# Altium PCB pcb-arduino-uno-r3-v1.PcbDoc
Units mil, origin at the board's own origin, x right, y up, seen from the top; angles counter-clockwise.
Board outline 2728.4 x 2278.4 mil, 2 copper layers (Top Layer, Bottom Layer); 50 components, 52 nets, 202 pads, 52 vias.
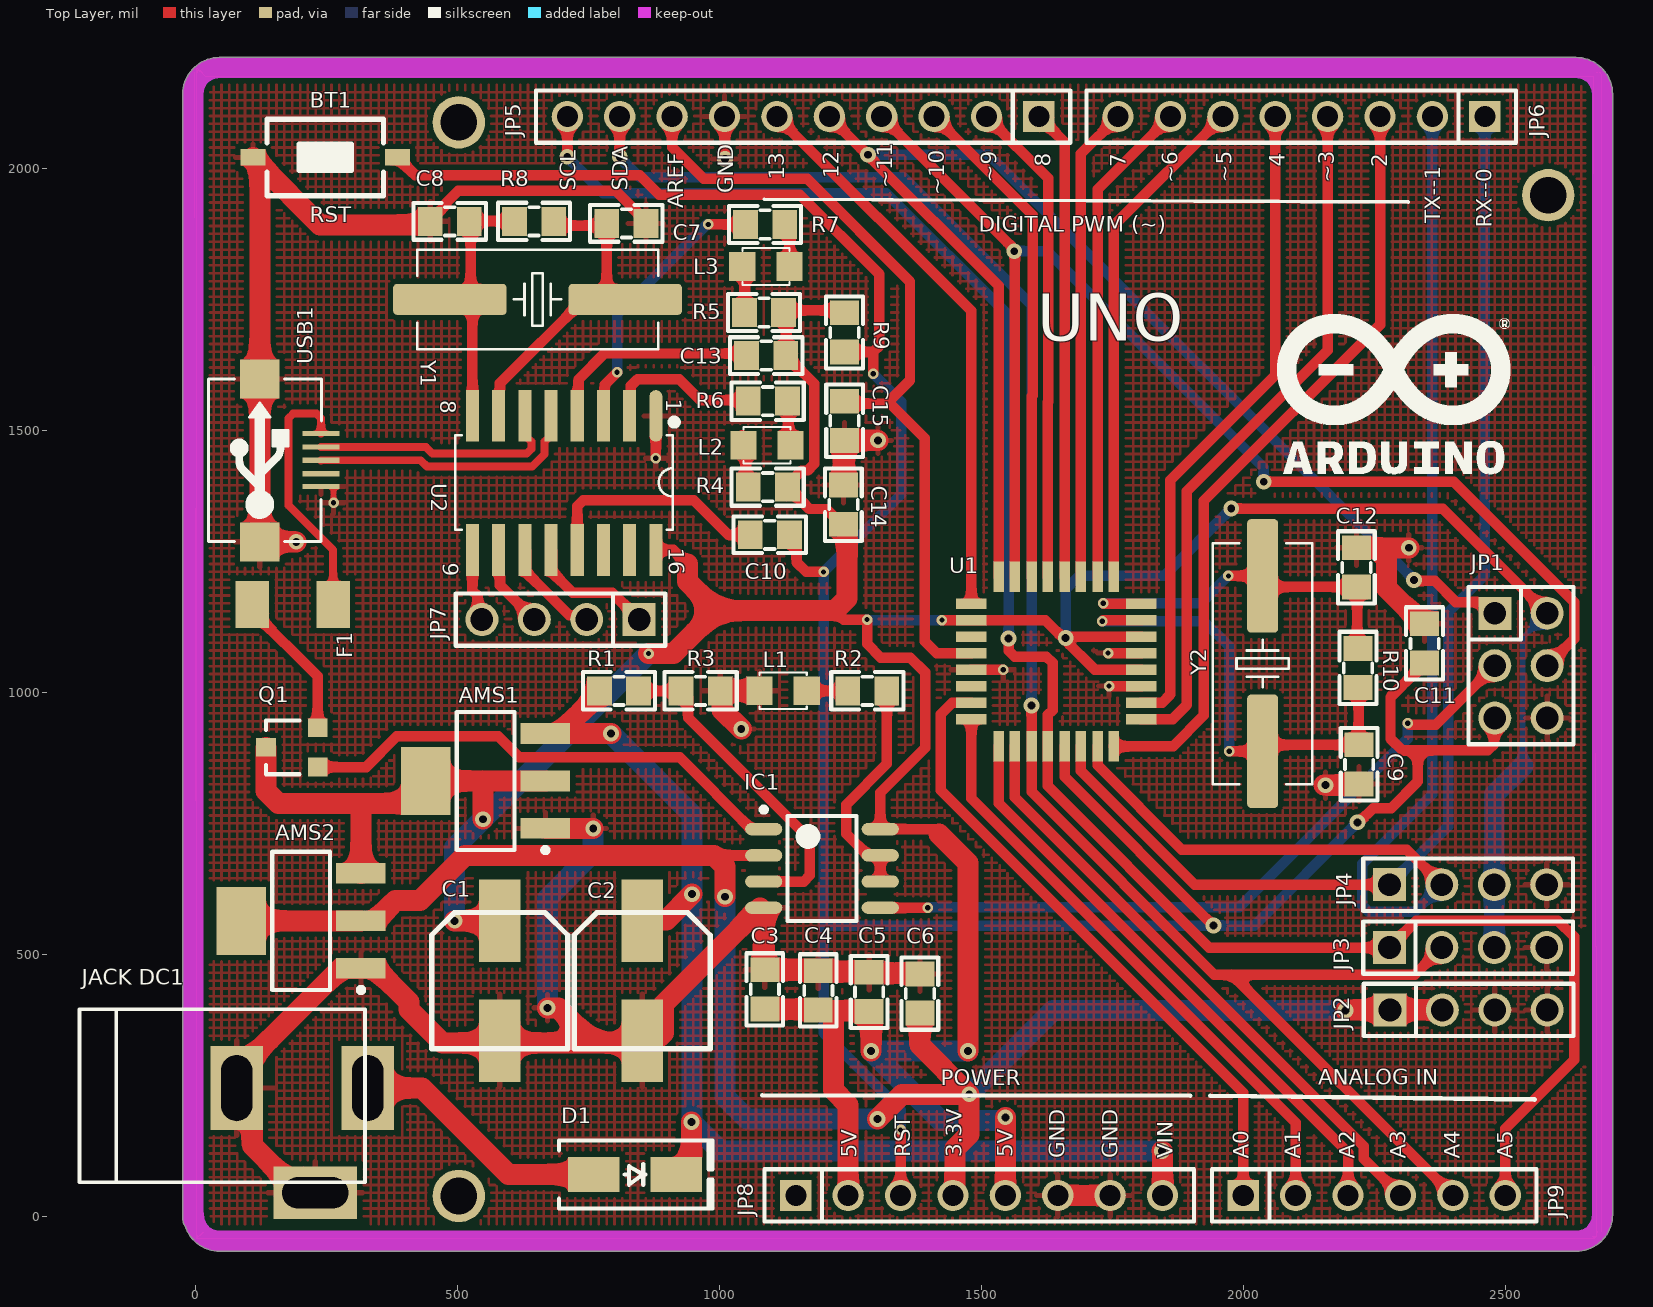
[diagram p0: Top Layer view]
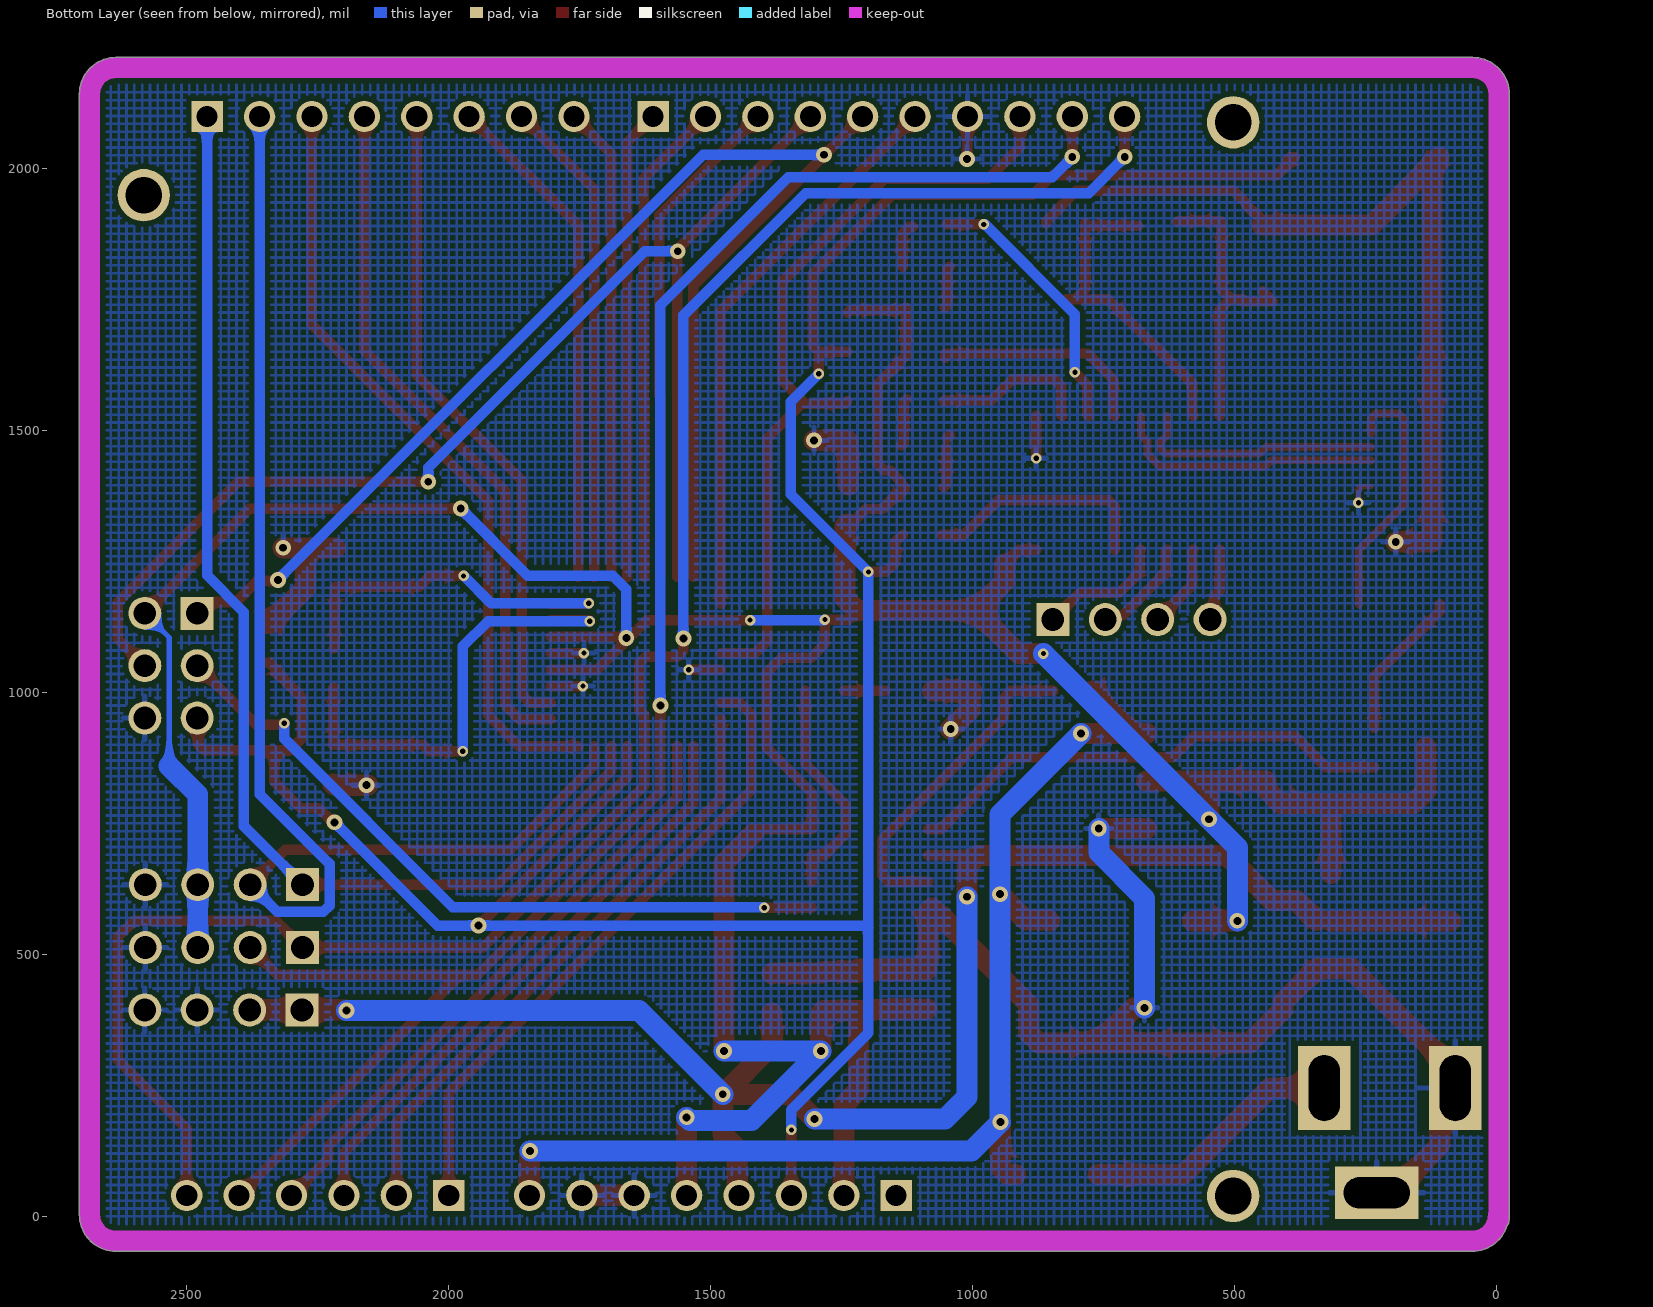
[diagram p1: Bottom Layer view, seen from below]
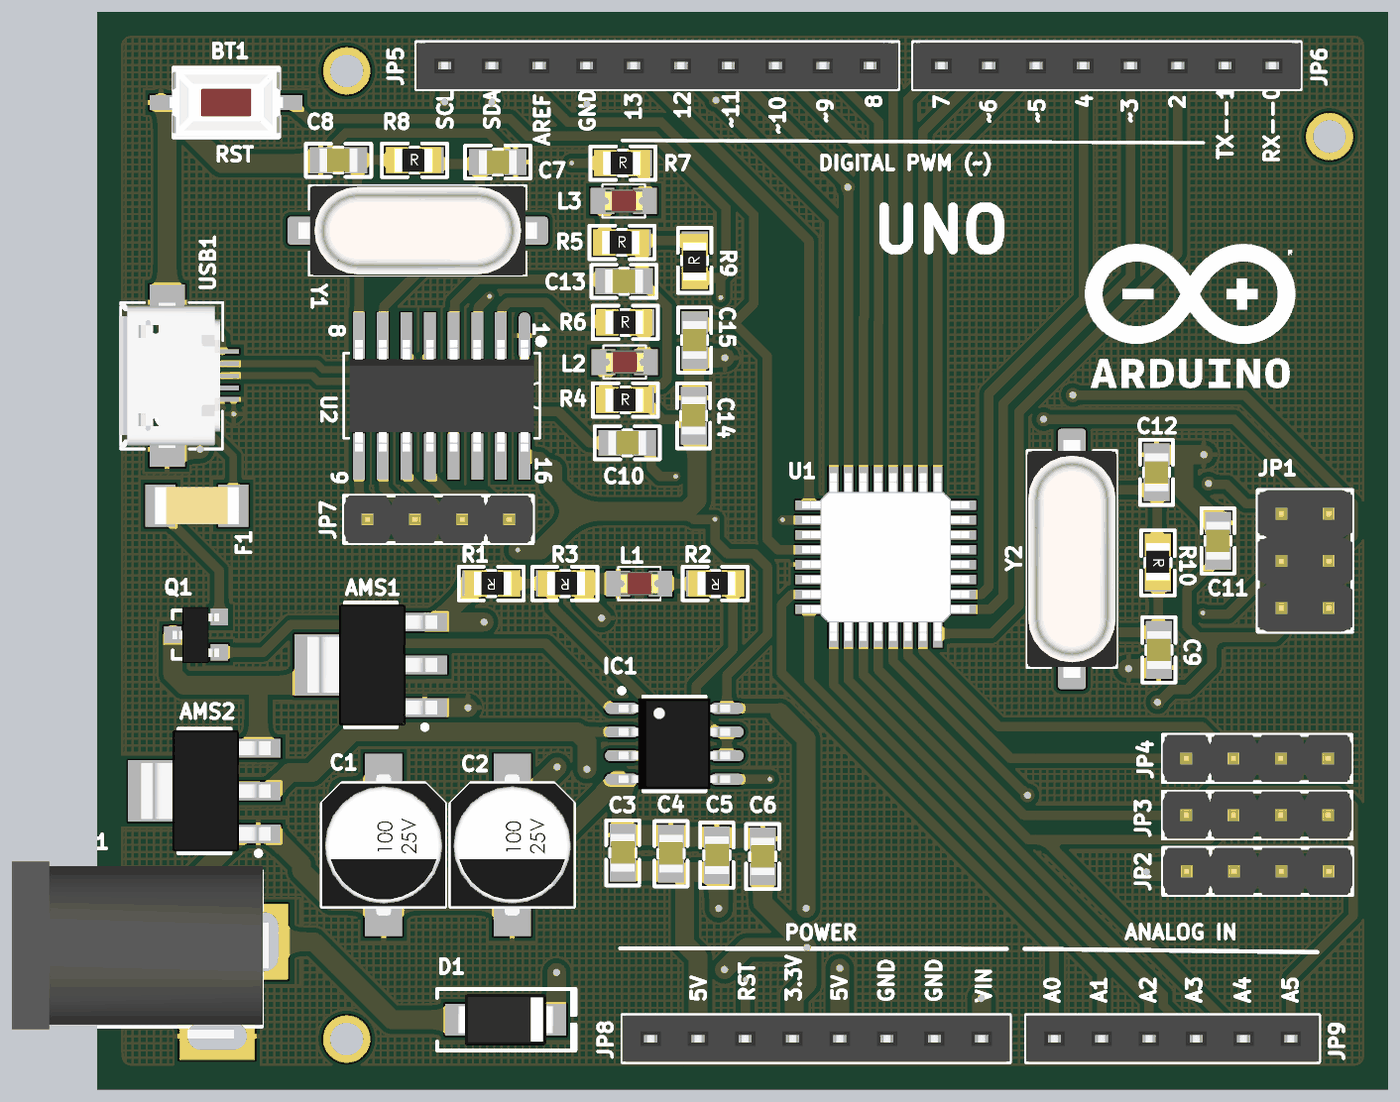
[diagram p2: 3D render of the assembled board from above, using the file's embedded part models]

## Layer stack, top to bottom
Top Solder: solder mask 0.4, Solder Resist, Dk 3.5
Top Layer: signal copper 1.4
Dielectric 1: dielectric 12.6, FR-4, Dk 4.8
Bottom Layer: signal copper 1.4
Bottom Solder: solder mask 0.4, Solder Resist, Dk 3.5

## Board outline
-20.35,-17.35 cw(c-5,-5) -24.7,-5 -24.7,2143 cw(c45,2143) 45,2212.7 2634,2212.7 cw(c2634,2143) 2703.7,2143 2703.7,4 cw(c2634,4) 2634,-65.7 46,-65.7 cw(c46,4)

## Design rules (kind name [scope] priority, off if disabled: settings)
Clearance [All] p1: gap=10 ignorepadtopadclearanceinfootprint=FALSE
DiffPairsRouting [All] p1: maxlimit=10 minlimit=10 mostfreqgap=10 toplayer_minwidth=15 toplayer_maxwidth=15 toplayer_prefwidth=15 bottomlayer_minwidth=15 bottomlayer_maxwidth=15 bottomlayer_prefwidth=15 maxuncoupledlength=500
HoleSize [All] p1: absolutevalues=TRUE maxlimit=300 minlimit=1 maxpercent=80.000 minpercent=20.000
MinimumSolderMaskSliver [All] p1: minsoldermaskwidth=3
PolygonConnect [All] p1: connectstyle=Relief reliefconductorwidth=10 reliefentries=4 polygonreliefangle="90 Angle" airgapwidth=10
RoutingVias [All] p1: holewidth=15 width=30 viastyle="Through Hole" minholewidth=10 minwidth=20 maxholewidth=28 maxwidth=50
SolderMaskExpansion SolderMaskExpansion_1 [isVia] p1: expansion=4 istentingtop=TRUE
SolderMaskExpansion [All] p2: expansion=4 istentingtop=FALSE
Width [All] p1: maxlimit=40 minlimit=10 preferedwidth=20
27 further rules are at their usual default settings.

## Classes and differential pairs
differential pair USB: +USB_P -USB_N

## Components (designator, comment, footprint, x,y, rotation, side; value= is the part's Value field where it differs from the comment)
AMS1 "AMS1117-5V" SOT223 553,832 r90 top value="AMS1117-3.3V SOT223"
AMS2 "AMS1117-3.3V" SOT223 201,565 r90 top value="AMS1117-3.3V SOT223"
BT1 "Nut Nhan 2 Chan SMD 3x6x2.5" "Nut Nhan 2 Chan SMD 3x6x2.5" 247,2022 r0 top
C1 "47uF" "tu nhom 6.3 (d)" 580,450.83 r270 top
C2 "47uF" "tu nhom 6.3 (d)" 852,450.83 r270 top
C3 "104" "tu 0805" 1085.87,434.23 r90 top
C4 "104" "tu 0805" 1187.87,432.23 r90 top
C5 "104" "tu 0805" 1284.87,429.23 r90 top
C6 "104" "tu 0805" 1381.87,426.23 r90 top
C7 "22pF" "tu 0805" 821.43,1896.13 r0 top
C8 "22pF" "tu 0805" 484.77,1899.87 r180 top
C9 "22pF" "tu 0805" 2220.13,863.77 r270 top
C10 "104" "tu 0805" 1095.21,1301.89 r0 top
C11 "104" "tu 0805" 2344.87,1094.43 r90 top
C12 "22pF" "tu 0805" 2214.87,1239.43 r90 top
C13 "104" "tu 0805" 1088.75,1643.69 r180 top
C14 "104" "tu 0805" 1235.84,1359.18 r90 top
C15 "104" "tu 0805" 1238.11,1519.53 r270 top
D1 "M7" "DIODE SMA" 838.26,81 r0 top
F1 "0.5A 125V" "Cau Chi SMD1808" 185,1169 r180 top
IC1 "LM358 SOP8" "SOP 8" 1195,665 r0 top
"JACK DC1" "JACK DC 5.5" "JACK DC 5.5" 203,146 r0 top value="Jac DC"
JP1 "JP 2x3 2.54" "JP 2x3 DT" 2529,1052 r270 top
JP2 "JP 1x4 2.54" "JP 1x4 DT" 2279,395 r0 top
JP3 "JP 1x4 2.54" "JP 1x4 DT" 2278,514 r0 top
JP4 "JP 1x4 2.54" "JP 1x4 DT" 2278,634 r0 top
JP5 "JP 1x10 2.54" "JP 1x10 CT" 1609,2100 r180 top
JP6 "JP 1x8 2.54" "JP 1x8 CT" 2460,2100 r180 top
JP7 "JP 1x4 2.54" "JP 1x4 DT" 846,1140 r180 top
JP8 "JP 1x8 2.54" "JP 1x8 CT" 1145,41 r0 top
JP9 "JP 1x6 2.54" "JP 1x6 CT" 1999,41 r0 top
L1 "LED 0805" LED-0805-Red 1166,1004 r180 top
L2 "LED 0805" LED-0805-Red 1044.98,1472.76 r0 top
L3 "LED 0805" LED-0805-Red 1042.98,1813.76 r0 top
Q1 "HF" SOT23 183.21,896 r90 top value=C9014
R1 "10k" "tro smd 0805" 807.77,1001.61 r180 top
R2 "1k" "tro smd 0805" 1281.57,1001.61 r180 top
R3 "10k" "tro smd 0805" 963.57,1001.61 r180 top
R4 "1k" "tro smd 0805" 1091.4,1395.15 r0 top
R5 "1k" "tro smd 0805" 1084.23,1728.39 r0 top
R6 "1k" "tro smd 0805" 1091.4,1559.15 r0 top
R7 "1k" "tro smd 0805" 1086.23,1896.39 r0 top
R8 "1M" "tro smd 0805" 645.43,1902.39 r0 top
R9 "10k" "tro smd 0805" 1235.58,1687.99 r90 top
R10 "1M" "tro smd 0805" 2220.39,1047.77 r270 top
U1 "ATMEGA168-20AU" ATMEGA168 1642,1060 r180 top
U2 "CH340C" SOIC16_50_284_25X90_SMT 703.98,1400.76 r270 top
USB1 "USB Micro 5p SMD" "USB Micro 5p SMD" 239,1443.82 r90 top
Y1 "16Mhz" "Thach Anh 2 chan SMD" 652.32,1751 r0 top value=4Mhz
Y2 "16Mhz" "Thach Anh 2 chan SMD" 2036,1056 r270 top value=4Mhz

## Footprints (in the part's own frame and the unit in brackets; to place one, negate y for a bottom-side part, rotate by r counter-clockwise, add the part's x,y. Pads: shape width x height; smd on the part's side, far side on the other; paste and mask are expansions set on the pad)
ATMEGA168 [mil]
  rect 58x20 smd: 1(-162,110) 2(-162,79) 3(-162,47) 4(-162,16) 5(-162,-16) 6(-162,-47) 7(-162,-79) 8(-162,-110) 17(162,-110) 18(162,-79) 19(162,-47) 20(162,-16) 21(162,16) 22(162,47) 23(162,79) 24(162,110)
  rect 20x58 smd: 9(-110,-162) 10(-79,-162) 11(-47,-162) 12(-16,-162) 13(16,-162) 14(47,-162) 15(79,-162) 16(110,-162) 25(110,162) 26(79,162) 27(47,162) 28(16,162) 29(-16,162) 30(-47,162) 31(-79,162) 32(-110,162)
  body extent -177,-177 177,177, height 47
"Cau Chi SMD1808" [mil]
  rect 64x90 smd: 1(-77,0) 2(77,0)
  body extent -91,-39 91,39, height 39
"DIODE SMA" [mm]
  rect 2.5x1.7 smd: 1(-2,0) 2(2,0)
  silkscreen extent -3.68,-1.65 3.75,1.65, body extent -2.6,-1.37 2.6,1.37, height 2.4
"JACK DC 5.5" [mil]
  rect 100x160 hole 59.06 slot 125.98 at 90 deg: 1(125,100) 2(-125,100)
  rect 160x100 hole 59.06 slot 125.98 at 0 deg: 3(25,-100)
  silkscreen extent -425,-80 120,250, body extent -410,-105 134,269, height 434
"JP 1x4 DT" [mm]
  rect 1.6x1.6 hole 1.1: 1(0,0)
  round 1.6 hole 1.1: 2(2.54,0) 3(5.08,0) 4(7.62,0)
  silkscreen extent -1.27,-1.27 8.89,1.27, body extent -1.27,-1.27 8.89,1.27, height 8.54
"JP 1x6 CT" [mm]
  rect 1.52x1.52 hole 1.02: 1(0,0)
  round 1.52 hole 1.02: 2(2.54,0) 3(5.08,0) 4(7.62,0) 5(10.16,0) 6(12.7,0)
  silkscreen extent -1.52,-1.27 14.22,1.27, body extent -1.52,-1.25 14.22,1.25, height 8.51
"JP 1x8 CT" [mm]
  rect 1.52x1.52 hole 1.02: 1(0,0)
  round 1.52 hole 1.02: 2(2.54,0) 3(5.08,0) 4(7.62,0) 5(10.16,0) 6(12.7,0) 7(15.24,0) 8(17.78,0)
  silkscreen extent -1.52,-1.27 19.3,1.27, body extent -1.52,-1.25 19.3,1.25, height 8.51
"JP 1x10 CT" [mm]
  rect 1.52x1.52 hole 1.02: 1(0,0)
  round 1.52 hole 1.02: 2(2.54,0) 3(5.08,0) 4(7.62,0) 5(10.16,0) 6(12.7,0) 7(15.24,0) 8(17.78,0) 9(20.32,0) 10(22.86,0)
  silkscreen extent -1.52,-1.27 24.38,1.27, body extent -1.52,-1.25 24.38,1.25, height 8.51
"JP 2x3 DT" [mm]
  rect 1.6x1.6 hole 1.1: 1(-2.54,-1.27)
  round 1.6 hole 1.1: 2(0,-1.27) 3(2.54,-1.27) 4(2.54,1.27) 5(0,1.27) 6(-2.54,1.27)
  silkscreen extent -3.81,-2.54 3.81,2.54, body extent -3.81,-2.54 3.81,2.54, height 8.55
LED-0805-Red [mil]
  rect 50x55 smd: 1(0,0) 2(90,0)
  silkscreen extent 0,-35 90,35, body extent 5,-25 85,25, height 43
"Nut Nhan 2 Chan SMD 3x6x2.5" [mm]
  rect 1.2x0.8 smd: 1(-3.5,0) 2(3.5,0)
  silkscreen extent -2.82,-1.85 2.82,1.85, body extent -3.05,-1.85 3.05,1.85, height 2.5
SOIC16_50_284_25X90_SMT [mm]
  oval 2.5x0.635 smd mask+0.076: 1(-3.25,4.42)
  rect 2.5x0.635 smd mask+0.076: 2(-3.25,3.15) 3(-3.25,1.88) 4(-3.25,0.61) 5(-3.25,-0.66) 6(-3.25,-1.93) 7(-3.25,-3.2) 8(-3.25,-4.47) 9(3.25,-4.47) 10(3.25,-3.2) 11(3.25,-1.93) 12(3.25,-0.66) 13(3.25,0.61) 14(3.25,1.88) 15(3.25,3.15) 16(3.25,4.42)
  silkscreen extent -3.07,-5.3 2.26,5.44, body extent -3.02,-4.97 2.98,4.93, height 1.4
"SOP 8" [mm]
  oval 1.8x0.6 smd: 1(-2.825,1.905) 2(-2.825,0.635) 3(-2.825,-0.635) 4(-2.825,-1.905) 5(2.825,-1.905) 6(2.825,-0.635) 7(2.825,0.635) 8(2.825,1.905)
  silkscreen extent -2.95,-2.55 1.68,2.98, body extent -2.99,-2.45 3,2.45, height 1.6
SOT23 [mm]
  rect 0.9x0.95 smd: 1(-0.95,-1.25) 2(0,1.25)
  rect 0.9x0.95 smd mask+0: 3(0.95,-1.25)
  silkscreen extent -1.3,-0.38 1.3,1.25, body extent -1.52,-1.23 1.48,1.27, height 1.06
SOT223 [mm]
  rect 1x2.4 smd: 1(-2.3,-2.9) 2(0,-2.9) 3(2.3,-2.9)
  rect 3.3x2.4 smd: 4(0,2.9)
  silkscreen extent -3.47,-3.03 3.35,1.4, body extent -3.25,-3.56 3.25,3.4, height 1.68
"Thach Anh 2 chan SMD" [mm]
  round 0.508 on Mech15: 0(0,0)
  rrect25% 5.5x1.5 smd: 1(-4.25,0) 2(4.25,0)
  silkscreen extent -5.84,-2.41 5.84,2.41, body extent -6.4,-2.41 6.4,2.42, height 4.29
"tro smd 0805" [mm]
  rect 1.2x1.4 smd: 1(-0.946,-0.061) 2(0.954,-0.061)
  silkscreen extent -1.75,-0.97 1.75,0.84, body extent -1.56,-0.76 1.44,0.64, height 0.53
"tu 0805" [mm]
  rect 1.2x1.4 smd: 1(-0.946,-0.003) 2(0.954,-0.003)
  silkscreen extent -1.75,-0.89 1.75,0.89, body extent -1.01,-0.64 1.01,0.63, height 0.61
"tu nhom 6.3 (d)" [mm]
  rect 4x2 smd: 1(-2.9,0) 2(2.9,0)
  silkscreen extent -3.3,-3.3 3.3,3.3, body extent -3.8,-3.3 3.8,3.3, height 8
"USB Micro 5p SMD" [mil]
  rect 10x70 smd: 1(51.18,0) 2(25.59,0) 3(0,0) 4(-25.59,0) 5(-50,0)
  rect 74.8x74.8 smd: 5(-155.51,116.84) 5(155.51,116.84)
  silkscreen extent -155,-1 155,215, body extent -157,5 158,218, height 107

## Part data
AMS1: library part "AMS1117 SMD", "Dán", Chung_Loai=Dán, Don_Vi=Con, Ma_Hang=MH000596
AMS2: library part "AMS1117 SMD_1", "Dán", Chung_Loai=Dán, Don_Vi=Con, Ma_Hang=MH000596
C1 C2: library part "Tu Nhom 47uF 50V", "Dán", Chung_Loai=Dán, Don_Vi=Con, Ma_Hang=MH002217, So_Chan=2, Ten_Linh_Kien="Tụ Nhôm 47uF 50V 6.3x5.5MM"
C3 C4 C5 C6 C10 C11 C13 C14 C15: library part "Tu 0805 104 50V 10%", "Dán", Chung_Loai=Dán, Don_Vi=Con, Ma_Hang=MH004551, So_Chan=2, Ten_Linh_Kien="Tụ 0805 104-100nF 10% 50V"
C7 C8 C9 C12: library part "Tu 0805 22pF 50V 10%", "Dán", Chung_Loai=Dán, Don_Vi=Con, Ma_Hang=MH004560, So_Chan=2, Ten_Linh_Kien="Tụ 0805 22P 10% 50V"
D1: library part "Diode M7 ( 4007 )", "Dán", Chung_Loai=Dán, Don_Vi=Con, Ma_Hang=MH000944, Ten_Linh_Kien="Diode M7 1N4007 SMD 1A 1000V"
F1: library part "Cau chi 0.5A 125V SMD1808", "Cau chi 0.5A 125V SMD1808", Ma_Hang=MH009241, Ten="Cầu Chì 0.5A 125V SMD1808 0451.500MRL"
IC1: "Dán", Chung_Loai=Dán, Don_Vi=Con, Ma_Hang=MH000609, Ten_Linh_Kien="LM358 SOP8"
JP1: library part "JP 2x3 2.54 Duc Thang", "Cắm", Chung_Loai=Cắm, Don_Vi=Con, Ma_Hang=MH002686, Ten_Linh_Kien="Jump Đôi Đực 2.54MM 2x40P Thẳng 11MM"
JP2 JP3 JP4 JP7: library part "JP 1x4 2.54 Duc Thang", "Cắm", Chung_Loai=Cắm, Don_Vi=Con, Ma_Hang=MH000903, Ten_Linh_Kien="Jump Đơn Đực 2.54MM 1x40P Thẳng 11MM"
JP5: library part "JP 1x10 2.54 Cai Thang", "Cắm", Chung_Loai=Cắm, Don_Vi=Con, Ma_Hang=MH004006, Ten_Linh_Kien="Jump Đơn Cái 2.54MM 1x20P Thẳng"
JP6 JP8: library part "JP 1x8 2.54 Cai Thang", "Cắm", Chung_Loai=Cắm, Don_Vi=Con, Ma_Hang=MH004006, Ten_Linh_Kien="Jump Đơn Cái 2.54MM 1x20P Thẳng"
JP9: library part "JP 1x6 2.54 Cai Thang", "Cắm", Chung_Loai=Cắm, Don_Vi=Con, Ma_Hang=MH004006, Ten_Linh_Kien="Jump Đơn Cái 2.54MM 1x20P Thẳng"
L1 L2 L3: library part "LED 0805 Do", "Dán", Chung_Loai=Dán, Don_Vi=Con, Ma_Hang=MH000897, Ten_Linh_Kien="LED 0805 Màu Đỏ (Red)"
Q1: library part "C1815 HF SMD", "NPN transistor"
R1 R3 R9: library part "Tro 0805 5% 10k", "Dán", Chung_Loai=Dán, Don_Vi=Con, Ma_Hang=MH005239, So_Chan=2, Ten_Linh_Kien="Trở 0805 5% 10k"
R2 R4 R5 R6 R7: library part "Tro 0805 1% 1k", "Dán", Chung_Loai=Dán, Don_Vi=Con, Ma_Hang=MH005468, So_Chan=2, Ten_Linh_Kien="Trở 0805 1% 1k"
R8 R10: library part "Tro 0805 5% 1M", "Dán", Chung_Loai=Dán, Don_Vi=Con, Ma_Hang=MH005235, So_Chan=2, Ten_Linh_Kien="Trở 0805 5% 1M"
U1: "AVR AVRÂ® ATmega Microcontroller IC 8-Bit 20MHz 16KB _8K x 16_ FLASH 32-TQFP _7x7_", Package="TQFP-32 Microchip", Availability=Unavailable, MF=Microchip, MP=ATMEGA168-20AU, Price=None, SnapEDA_Link=https://www.snapeda.com/parts/ATMEGA168-20AU/Microchip/view-part/776709/?ref=snap
U2: library part IC_CH340C, "USB Bridge, USB to UART USB 2.0 UART Interface", Alternate Part Number-1=NA, Case/Package=SOIC16, Manufacturer=Olimex, Supplier Part Number-1=C84681, Manufacturer Part Number=CH340C, Supplier-1=LCSC
USB1: "USB Type B", Ma_Hang=MH001020, Ten="MicroUSB MK5P SMD"
Y1 Y2: library part "Thach Anh 2 chan SMD", "Crystal For all Crystal 2pin."
BT1: Ma_Hang=MH001036, Ten="Nút Nhấn 2 Chân 3x6x2.5MM SMD"

## Free pads (board coordinates)
  round 100 hole 70: 3(2581,1950) 4(502,40) 5(502,2089)

## Via types
v1: diameter 30, hole 15, Top Layer to Bottom Layer, tented both sides, 33 vias
v2: diameter 20, hole 10, Top Layer to Bottom Layer, tented both sides, 19 vias

## Nets (pads, with @x,y where several pads share a name; then routed paths per layer and width w, separated by ;. In a path a pad name is that pad's centre, name@x,y a point inside that pad or via, vN(x,y) a via of type N, cw(c..) or ccw(c..) an arc to the next point about the centre after c; other vN are vias at no path point)
3.3V: AMS2.2 AMS2.4 C6.1 IC1.2 JP2.1 JP2.2 JP8.4 | length 3363.4
  Top Layer w20: 989,690 IC1.2
  Top Layer w40: AMS2.4 AMS2.2 ; AMS2.2@342.42,565.31 381.1,604 428,604 514,690 989,690 1010,669 v1(1010,611) ; v1(1301,187) 1348,234 v1(1476,234) ; C6.1 1382,328 v1(1476,234) ; JP8.4 1448.8,44.8 1448.8,130.17 1476,157.37 v1(1476,234) ; v1(2194,394) 2195,395 JP2.1 JP2.2
  Bottom Layer w40: v1(1010,611) 1010,229 1052,187 v1(1301,187) ; v1(1476,234) 1636,394 v1(2194,394)
5V: AMS1.2 AMS1.4 AMS2.3 C1.1 C3.1 C4.1 C5.1 C13.1 C14.1 IC1.8 JP1.6 JP3.3 JP4.3 JP8.2 JP8.5 Q1.2 R4.2 R5.2 R9.2 U1.4 U1.6 U1.18 U2.16 | length 7975.7
  Top Layer w20: U2.16 911.19,1272.81 938,1246 ; 1219.57,1157 1236.57,1140 v2(1281,1140) 1281,1094 1307.5,1067.5 1363.5,1067.5 1392,1039 1392,895.57 1306.22,809.79 IC1.8 1409,740 1418,731 ; C14.1 1232.04,1321.96 1203,1351 1170.74,1351 1146.54,1375.2 1142.6,1375.2 1128.98,1388.82 R4.2 1137.22,1401 1137.22,1404.94 1156.74,1424.46 1167.46,1424.46 1179.98,1436.98 1179.98,1589.82 1133.27,1636.53 C13.1 1125.98,1647.76 1126.88,1648.66 1126.88,1734.66 1126.98,1734.76 1131.58,1730.16 1233.38,1730.16 R9.2 ; v2(1424,1139) U1.18 1621,1139 v1@1653,1107 ; v1@1657.5,1102.5 1716,1044 U1.4 ; v1@1660,1107 U1.6 ; v1(1976,1352) 1976.41,1351.59 2379.41,1351.59 JP1.6
  Top Layer w40: Q1.2 134,812.43 157.43,789 324,789 ; AMS2.3 315.17,780.17 324,789 ; v1(494,565) C1.1 ; v1(548,759) 548,831 547,832 ; AMS1.2 666.86,831.69 606.26,831.69 605.94,832 547,832 ; v2(864,1075) 911.8,1075 993.8,1157 ; 938,1246 938,1212.8 993.8,1157 ; C3.1 1087,396 1187,396 C4.1 1189.5,393.5 1217,393.5 ; C14.1 1239.38,1321.96 1243,1318.33 1243,1180.43 1219.57,1157 993.8,1157 ; JP8.2 1245,214 1217,242 1217,393.5 ; v1(1288.78,316.78) 1288.78,388.38 1285.16,392 C5.1 1283.5,393.5 1217,393.5 ; 1418,731 1473.78,675.22 v1(1473.78,316.78) ; JP8.5 v1(1545,190) ; 324,789 411.58,789 438.83,816.24 AMS1.4 547,832
  Bottom Layer w10: 2532.5,860.5 2532.5,1105.5 JP1.6
  Bottom Layer w20: v2(1281,1140) 1282,1139 v2(1424,1139) ; v1(1660,1105) 1660,1198 1686,1224 1848,1224 v1(1976,1352)
  Bottom Layer w40: v1(494,565) 494,705 v1(548,759) v2(864,1075) ; v1(1473.78,316.78) v1(1288.78,316.78) 1421.57,184 1539,184 v1(1545,190) ; JP3.3 JP4.3 2478,806 2532.5,860.5
AD0: JP9.1 U1.23 | length 1224.3
  Top Layer w20: U1.23 1443.72,981 1422,959.28 1422,814.37 1999,237.37 JP9.1
AD1: JP9.2 U1.24 | length 1165.4
  Top Layer w20: U1.24 1480,798.8 2099,179.8 JP9.2
AD2: JP9.3 U1.25 | length 1133.3
  Top Layer w20: U1.25 1532,789.22 2199,122.22 JP9.3
AD3: JP9.4 U1.26 | length 1161.9
  Top Layer w20: U1.26 1563,800.65 2229,134.65 2229,111 JP9.4
AD4/SDA: JP3.2 JP5.9 JP9.5 U1.27 | length 3454.5
  Top Layer w20: v1(809,2023) JP5.9 ; v1(1595,976) U1.27 1595,811.08 1943.57,462.5 1977.5,462.5 ; JP3.2 2326.5,462.5 1977.5,462.5 ; JP9.5 1977.5,462.5
  Bottom Layer w20: v1(809,2023) 809,2022 847,1984 1351,1984 1595,1740 v1(1595,976)
AD5/SCL: JP3.1 JP5.10 JP9.6 U1.28 | length 3730.7
  Top Layer w20: v1(709,2023) JP5.10 ; v1(1551,1104) 1551.36,1103.64 1551.36,1080.72 1563.07,1069 1623.28,1069 1635,1057.28 1635,967 1626,958 U1.28 1626,822.5 1934.5,514 JP3.1 2329.5,565.5 2599.33,565.5 2630.5,534.33 2630.5,299.8 2499,168.31 JP9.6
  Bottom Layer w20: v1(709,2023) 778,1954 1318,1954 1551,1721 v1(1551,1104)
AREF: C15.1 JP5.8 U1.20 | length 1535.8
  Top Layer w20: JP5.8 909,2041 969,1981 1167,1981 1363,1785 1363,1597 1325,1559 1325,1552 ; C15.1 1242.74,1552 1325,1552 ; U1.20 1413.72,1076 1391,1098.72 1391,1486 1325,1552
CH340_XT1: C7.1 R8.2 U2.7 Y1.2 | length 622.8
  Top Layer w20: U2.7 580.5,1531.21 580.5,1590.59 740.91,1751 Y1.2@803.72,1751 ; R8.2@683,1892 C7.1@784.2,1892 ; C7.1 C7.1@784.2,1892 ; Y1.2 Y1.2@803.72,1751 ; C7.1@784.2,1892 784.2,1770.53 Y1.2@803.72,1751
CH340_XT2: C8.1 R8.1 U2.8 Y1.1 | length 581.5
  Top Layer w20: Y1.1@446,1766.53 426.47,1747 Y1.1@485,1747 ; Y1.1 Y1.1@504.97,1751 ; U2.8 528,1731.47 508.47,1751 Y1.1@504.97,1751 ; R8.1 607.7,1900.5 524.5,1900.5 524.5,1770.53 Y1.1@504.97,1751
"CMD PWR": IC1.1 Q1.1 | length 948.8
  Top Layer w20: Q1.1 324.94,858.6 383.3,916.96 577.55,916.96 617.51,877 923.16,877 1060.16,740 IC1.1
CTS: JP7.4 U2.9 | length 143.8
  Top Layer w20: U2.9@525.5,1233.59 U2.9@528,1236.09 ; U2.9 U2.9@528,1236.09 ; JP7.4 537.77,1148.23 537.77,1185.23 528,1195 U2.9@528,1236.09
DCD: JP7.1 U2.12 | length 246.4
  Top Layer w20: U2.12 680.5,1270.31 680.5,1230.31 719.31,1191.5 794.5,1191.5 JP7.1
DSR: JP7.3 U2.10 | length 161
  Top Layer w20: U2.10 580.5,1270.31 580.5,1205.5 JP7.3
DTR: C10.1 U2.13 | length 445.4
  Top Layer w20: U2.13 728,1356.04 739.71,1367.76 949.98,1367.76 1015.98,1301.76 C10.1
GND: "JACK DC1.2" "JACK DC1.3" AMS1.1 AMS2.1 BT1.1 C1.2 C2.2 C3.2 C4.2 C5.2 C6.2 C7.2 C8.2 C9.2 C11.2 C12.2 C14.2 C15.2 IC1.4 JP1.4 JP2.3 JP2.4 JP3.4 JP4.4 JP5.7 JP8.6 JP8.7 L1.2 R3.1 U1.3 U1.5 U1.21 U2.1 USB1.5 | length 5547.1
  Top Layer w10: USB1.5@239,1393.82 263,1393.82 v2(263,1363)
  Top Layer w20: C8.2@447.2,1893.21 447.2,1903.94 460.82,1917.56 463.26,1917.56 478.38,1932.68 478.38,1935.84 500.53,1958 801.66,1958 827.82,1931.84 827.82,1931.12 859,1899.94 C7.2 ; v2(878,1448) U2.1 ; JP5.7 1009.5,2099.5 1009.5,2019.5 v1(1010,2019) ; U1.21 v2(1541,1044) ; v2(1741,1076) U1.5 ; v2(1743,1013) U1.3
  Top Layer w40: BT1.1 109.2,2021.37 BT1.1@122.16,2008.42 ; v1(191.69,1288.31) 122.16,1288.31 122.16,1599.33 BT1.1@122.16,2008.42 ; 228,46 198,46 108,136 108,216 78,246 78,276 276.13,474.13 314.86,474.13 AMS2.1 342.1,474.45 406.52,410.03 406.52,396.11 470.63,332 759,332 ; C8.2@447.2,1893.21 237.37,1893.21 BT1.1@122.16,2008.42 ; AMS1.1 v1(758.45,741.45) ; v1(671,399) 692,399 759,332 ; v1(1041,931) 1004.43,967.57 1004.43,1000.38 R3.1 L1.2 ; C3.2 1087,470.8 1187,470.8 C4.2 1189.5,468.3 1283.5,468.3 C5.2 1286.5,465.3 1380.5,465.3 C6.2 ; 1217,472.8 1099.97,472.8 1083.78,488.99 1083.78,582.76 1076.54,590 892.37,405.83 892.37,351.37 873,332 759,332 ; C14.2 1236.98,1397.76 1236.98,1480.96 C15.2 v1(1302.04,1481.96) ; JP8.6 JP8.7 ; v1@2153,824 v1(2156,824) 2217.8,824 C9.2 ; C12.2 2265,1277 ; v1(2315,1277) 2265,1277 ; C11.2 2341.06,1132 2272.56,1200.5 2272.56,1255.8 2265,1263.36 2265,1277
  Bottom Layer w40: v1(671,399) 671,608 758.45,695.45 v1(758.45,741.45)
IO0/RXD: JP4.1 JP6.1 U1.30 | length 2267.1
  Top Layer w20: U1.30 1689,851.29 1906.29,634 JP4.1
  Bottom Layer w20: JP4.1 2390,746 2390,1154.28 2460,1224.28 JP6.1
IO1/TXD: JP4.2 JP6.2 U1.31 | length 2526.5
  Top Layer w20: U1.31 1721,861.72 1881.72,701 2311,701 JP4.2
  Bottom Layer w20: JP6.2 2360,807 2238.5,685.5 2238.22,685.5 2226.5,673.78 2226.5,594.22 2238.22,582.5 2326.5,582.5 JP4.2
IO2: JP6.3 U1.32 | length 1478.6
  Top Layer w20: U1.32 1865,898 1924,957 1924,1367 2260,1703 JP6.3
IO3: JP6.4 U1.1 | length 1332.6
  Top Layer w20: U1.1 1864,950 1891,977 1891,1385 2160,1654 JP6.4
IO4: JP6.5 U1.2 | length 1248.5
  Top Layer w20: U1.2 1844,981 1860,997 1860,1406 2060,1606 JP6.5
IO5: JP6.6 U1.9 | length 964.2
  Top Layer w20: U1.9 1752,1892 JP6.6
IO6: JP6.7 U1.10 | length 935.6
  Top Layer w20: U1.10 1721,1961 JP6.7
IO7: JP6.8 U1.11 | length 907.4
  Top Layer w20: U1.11 1689,2029 JP6.8
IO8: JP5.1 U1.12 | length 898.3
  Top Layer w20: JP5.1 1658,2051 U1.12
IO9: JP5.2 U1.13 | length 927.3
  Top Layer w20: JP5.2 1627,1982 1627,1555.96 1626,1554.96 U1.13
MISO: JP1.1 JP5.5 U1.16 | length 2570.2
  Top Layer w20: JP5.5 1282.5,2026.5 1532,1777 U1.16 ; v1(2325,1215.64) 2326.91,1213.73 2364.13,1213.73 2404.36,1173.5 2457.5,1173.5 JP1.1
  Bottom Layer w20: v1(1283,2027) 1513.64,2027 v1(2325,1215.64)
MOSI: JP1.5 JP5.4 U1.15 | length 2484.6
  Top Layer w20: JP5.4 v1@1563,1846 ; U1.15 v1@1563,1843 ; v1(2038,1403) 2400.83,1403 2630.5,1173.33 2630.5,1103.5 JP1.5
  Bottom Layer w20: v1(1562,1843) 1625,1843 1821.57,1646.43 2038,1430 v1(2038,1403)
NetD1_1: "JACK DC1.1" D1.1 | length 499.9
  Top Layer w40: 328,246 432,246 597,81 D1.1
NetF1_1: F1.1 USB1.1 | length 488.9
  Top Layer w15: USB1.1 239,1524.21 230.21,1533 185.79,1533 177,1524.21 177,1358 262,1273 F1.1
NetIC1_3: IC1.3 R1.1 R3.2 | length 628.3
  Top Layer w20: R1.1 R3.2 939.62,990.38 939.62,952.77 1172,720.39 1172,651.72 1160.28,640 IC1.3
NetIC1_5: IC1.5 JP1.2 | length 1383.6
  Top Layer w20: IC1.5 v2(1397,590) ; v2(2313,942) 2316,939 2366,939 JP1.2
  Bottom Layer w20: v2(1397,590) 1398,591 1991,591 2313,913 v2(2313,942)
NetIC1_6: IC1.6 IC1.7 R2.1 | length 437.1
  Top Layer w20: IC1.6 IC1.7 1282.6,690 1241,731.6 1241,787 1318.8,864.8 R2.1
NetL1_1: L1.1 R2.2 | length 78
  Top Layer w20: L1.1 R2.2
NetL2_1: L2.1 R4.1 | length 83.8
  Top Layer w20: L2.1@1042.96,1491.52 L2.1@1047.55,1486.92 ; L2.1@1049.58,1468.16 1049.58,1397.36 R4.1
NetL2_2: L2.2 R6.2 | length 89.3
  Top Layer w20: R6.2@1124.98,1560.76 R6.2 ; R6.2@1130.98,1554.76 1130.98,1476.76 L2.2
NetL3_1: L3.1 R5.1 | length 82.8
  Top Layer w20: L3.1 1047.58,1809.16 1047.58,1739.36 R5.1@1052.17,1734.76
NetL3_2: L3.2 R7.2 | length 87.1
  Top Layer w20: R7.2@1113.48,1889.26 R7.2@1121.16,1889.26 ; R7.2@1121.16,1888.26 1132.98,1876.44 L3.2
NetR6_1: R6.1 U2.2 | length 304.8
  Top Layer w20: U2.2 830.5,1531.21 830.5,1586.28 842.98,1598.76 922.98,1598.76 962.98,1558.76 1052.17,1558.76 R6.1
NetR7_1: R7.1 U2.3 | length 520.9
  Top Layer w20: U2.3 780.5,1531.21 780.5,1588.5 v2(804,1612) ; v2(978,1894) R7.1
  Bottom Layer w20: v2(804,1612) 804,1723 975,1894 v2(978,1894)
RESET: BT1.2 C10.2 C11.1 JP1.3 JP8.3 R9.1 U1.29 | length 5300.9
  Top Layer w20: BT1.2 392.67,2022 398.42,2016.25 398.42,2008.38 418.8,1988 847.09,1988 884.09,1951 1153,1951 1304.76,1799.24 1304.76,1662.48 1293.04,1650.76 ; C10.2 1146.4,1288.14 1146.4,1249.31 1164.72,1231 v2(1198,1231) ; R9.1 1293.04,1650.76 ; v2(1293.04,1609.04) 1293.04,1650.76 ; JP8.3 v2(1345,166) ; U1.29 1658,839.86 1941.86,556 v1(1942,556) ; v1(2217,753) 2219.71,753 2246.85,780.15 2281.15,780.15 2332,831 2332,890.5 ; C11.1 2341.06,1057.2 2327.44,1043.57 2327.44,1039.64 2280,992.2 2280,912.72 2302.21,890.5 2332,890.5 ; JP1.3 2477.5,950.5 2477.5,902.22 2465.79,890.5 2332,890.5
  Bottom Layer w20: v2(1293.04,1609.04) 1346,1556.09 1346,1379 v2(1198,1231) 1198,552 ; v2(1345,166) 1345,204 1198,351 1198,552 ; v1(2217,753) 2020,556 v1(1942,556) 1202,556 1198,552
RI: JP7.2 U2.11 | length 196.4
  Top Layer w20: U2.11 630.5,1270.31 630.5,1230.31 712.58,1148.23 737.77,1148.23 JP7.2
SCK: JP5.6 U1.17 | length 1083.8
  Top Layer w20: JP5.6 1300.86,1908.14 1301.15,1908.14 1480,1729.28 U1.17
SS: JP5.3 U1.14 | length 956.7
  Top Layer w20: JP5.3 1597,1912 1597,1568.39 1595,1566.39 U1.14
USB_N: U2.5 USB1.3 | length 519.8
  Top Layer w15: USB1.3 239.3,1444.11 428.91,1444.11 441.03,1432 642.07,1432 665.5,1455.43 665.5,1479.5 678,1492 U2.5
USB_P: U2.6 USB1.2 | length 478.4
  Top Layer w15: USB1.2 239.3,1469.11 439.27,1469.11 451.38,1457 631.71,1457 640.5,1465.79 640.5,1479.5 628,1492 U2.6
V3: C13.2 U2.4 | length 415.8
  Top Layer w20: U2.4 730.5,1531.21 730.5,1598.5 779.76,1647.76 C13.2@1051.17,1647.76 ; C13.2@1051.17,1639.89 C13.2
VIN: AMS1.3 C2.1 D1.2 JP8.8 R1.2 | length 2287.7
  Top Layer w40: AMS1.3 AMS1.3@694.1,922.55 ; R1.2 766.57,1000.38 766.57,995.02 AMS1.3@694.1,922.55 ; v1(792.55,922.55) AMS1.3@694.1,922.55 ; C2.1 854,567 898,567 v1(947,616) ; D1.2 932.54,81 946,94.46 v1(946,181) ; v1(1844,126) 1845,125 JP8.8
  Bottom Layer w40: v1(792.55,922.55) 947,768.1 v1(947,616) 947,182 v1(946,181) 1001,126 v1(1844,126)
VUSB: F1.2 Q1.3 | length 287.1
  Top Layer w20: F1.2 108,1156 232.43,1031.57 Q1.3
XTAL1: C9.1 R10.2 U1.7 Y2.2 | length 900
  Top Layer w20: v2(1730,1137) 1732,1139 U1.7 ; v2(1972.32,888.68) Y2.2 2048.32,901 C9.1 2219,902 2219,1009.2 R10.2
  Bottom Layer w20: v2(1730,1137) 1924,1137 1972.32,1088.68 v2(1972.32,888.68)
XTAL2: C12.1 R10.1 U1.8 Y2.1 | length 705.2
  Top Layer w20: v2(1732,1171) 1733,1170 U1.8 ; v2(1970.68,1223.32) Y2.1 2036,1221.72 2055.53,1202.2 C12.1 2216.5,1200.7 2216.5,1086.5 R10.1
  Bottom Layer w20: v2(1732,1171) 1918.35,1171 v2(1970.68,1223.32)
pads on no net: JP8.1 U1.19 U1.22 U2.14 U2.15 USB1.4 Y1.0 Y2.0

## Polygon pours and split planes (outlines as drawn)
GND on Top Layer "top" (hatched 90Degree grid 15 track 5, remove dead copper, pour order 7): 4,2187 2676,2187 2682,2181 2682,-48 14,-48 10,-52
GND on Top Layer "gnd_top" (hatched 90Degree grid 15 track 5, remove dead copper, shelved, pour order 3): 2668,2176 19,2176 6,2189 2,2185 2,-41 2670,-41 2674,-37
GND on Top Layer "gnd_top" (hatched 90Degree grid 15 track 5, remove dead copper, shelved, pour order 2): -2,2185 2674,2185 2674,-37 2672,-39 2670,-37 2,-37
GND on Top Layer "gnd_bottom" (hatched 90Degree grid 15 track 5, remove dead copper, shelved, pour order 0): 2,2193 10,2185 2674,2185 2674,-37 2670,-41 2666,-37 2,-37
GND on Top Layer "gnd_top" (hatched 90Degree grid 15 track 5, remove dead copper, shelved, pour order 1): -2,2185 2678,2185 2682,2181 2682,-29 14,-29 2,-41
GND on Bottom Layer "bottom" (hatched 90Degree grid 15 track 5, remove dead copper, pour order 6): 6,2190 10,2194 2669,2194 2669,-52 2661,-44 2,-44

## Keep-outs
Keep-Out Layer:
  lines w39.37: -5,-5 -5,2143 cw(c45,2143) 45,2193 2634,2193 cw(c2634,2143) 2684,2143 2684,4 cw(c2634,4) 2634,-46 46,-46 cw(c46,4) -4,4

## Silkscreen, mask and mechanical layers (free items; w line width, h text height)
Top Overlay:
  drawing of 15 lines, arcs and shapes, not listed
  text "8" at 1632,2004 h30 r90
  text "4" at 2078,2004 h30 r90
  text "7" at 1775,2003 h30 r90
  text "2" at 2274,2003 h30 r90
  text "12" at 1227,1982 h30 r90
  text "13" at 1123,1979 h30 r90
  text "~9" at 1529,1974 h30 r90
  text "~5" at 1977,1974 h30 r90
  text "~3" at 2173,1974 h30 r90
  text "~6" at 1874,1973 h30 r90
  text "~11" at 1329,1963 h30 r90
  text "SCL" at 725,1958 h30 r90
  text "SDA" at 824,1958 h30 r90
  text "GND" at 1026,1954 h30 r90
  text "~10" at 1428,1950 h30 r90
  text "AREF" at 930,1925 h30 r90
  text "RST" at 217,1898 h30
  text "TX--1" at 2375,1896 h30 r90
  text "RX--0" at 2473,1888 h30 r90
  text "DIGITAL PWM (~)" at 1494,1880 h30
  text "UNO" at 1606,1672 h90
  text "ANALOG IN" at 2142,252 h30
  text "POWER" at 1422,251 h30
  text "RST" at 1363,114 h30 r90
  text "3.3V" at 1462,114 h30 r90
  text "5V" at 1559,114 h30 r90
  text "5V" at 1261,113 h30 r90
  text "GND" at 1658,112 h30 r90
  text "GND" at 1759,112 h30 r90
  text "VIN" at 1864,112 h30 r90
  text "A0" at 2009,111 h30 r90
  text "A1" at 2108,111 h30 r90
  text "A2" at 2212,111 h30 r90
  text "A3" at 2309,111 h30 r90
  text "A4" at 2412,111 h30 r90
  text "A5" at 2513,111 h30 r90

## Text inside footprints (layer, text, board x,y; h text height)
U2: Top Overlay "1" at 898,1561.74 h30 r270; Top Overlay "8" at 466.5,1558.87 h30 r270; Top Overlay "9" at 471.35,1248.09 h30 r270; Top Overlay "16" at 903,1276.74 h30 r270